# EAGLE board hydra (EAGLE 5.06)
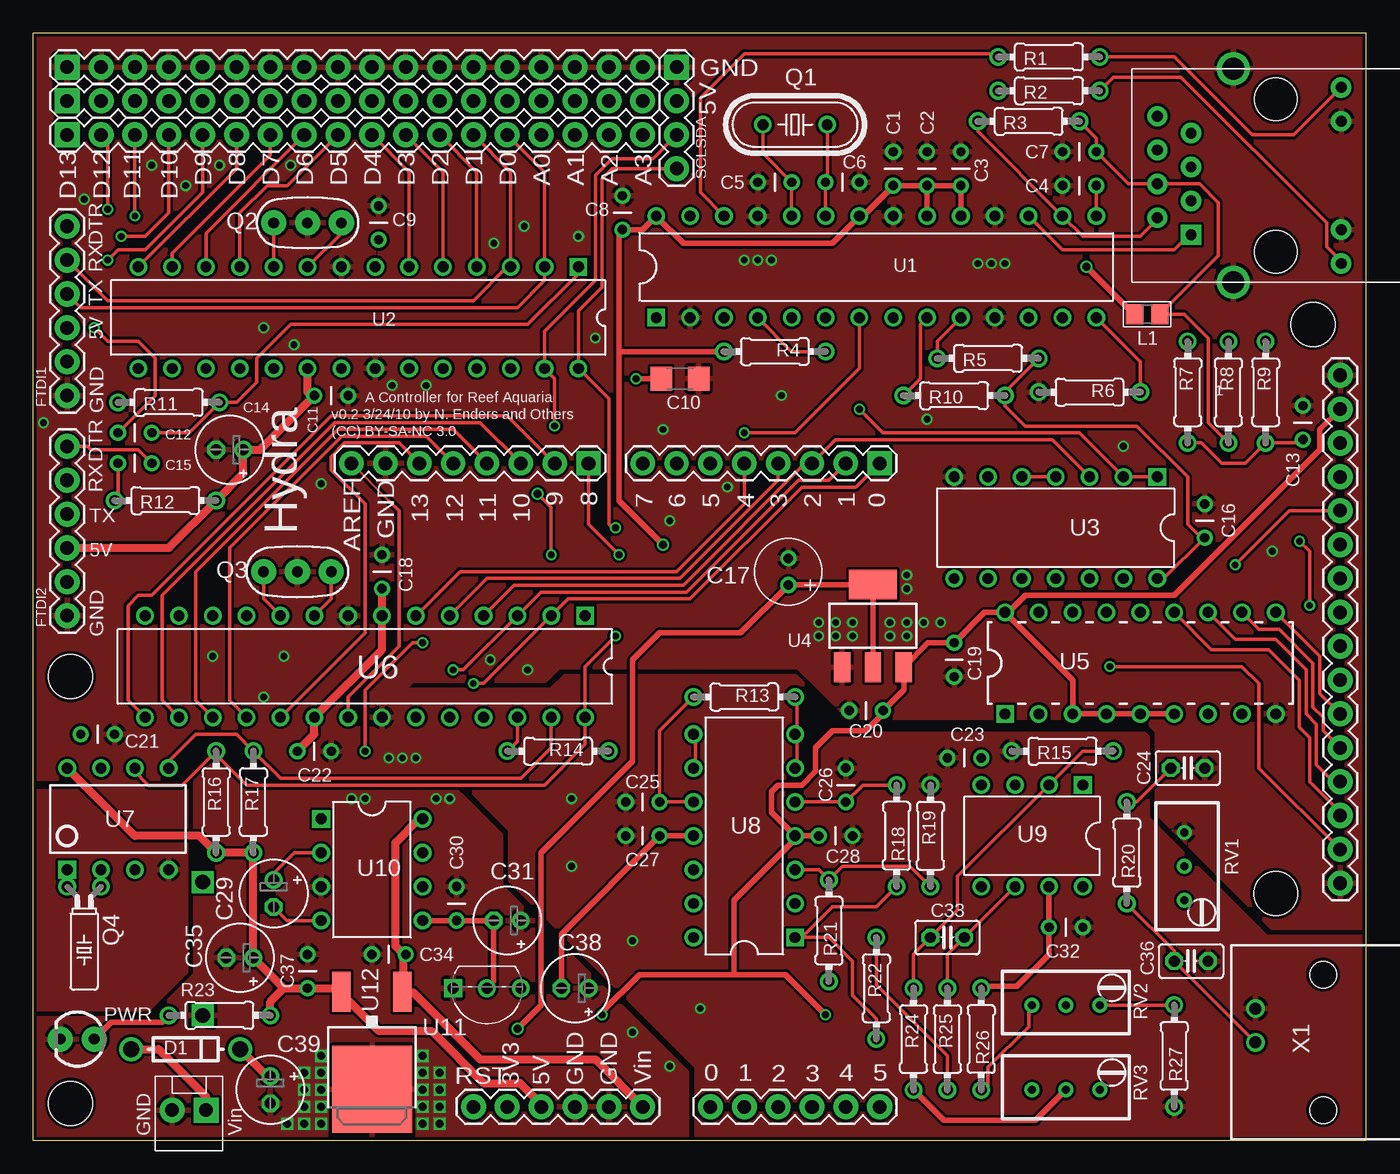
[diagram p0: board, top side]
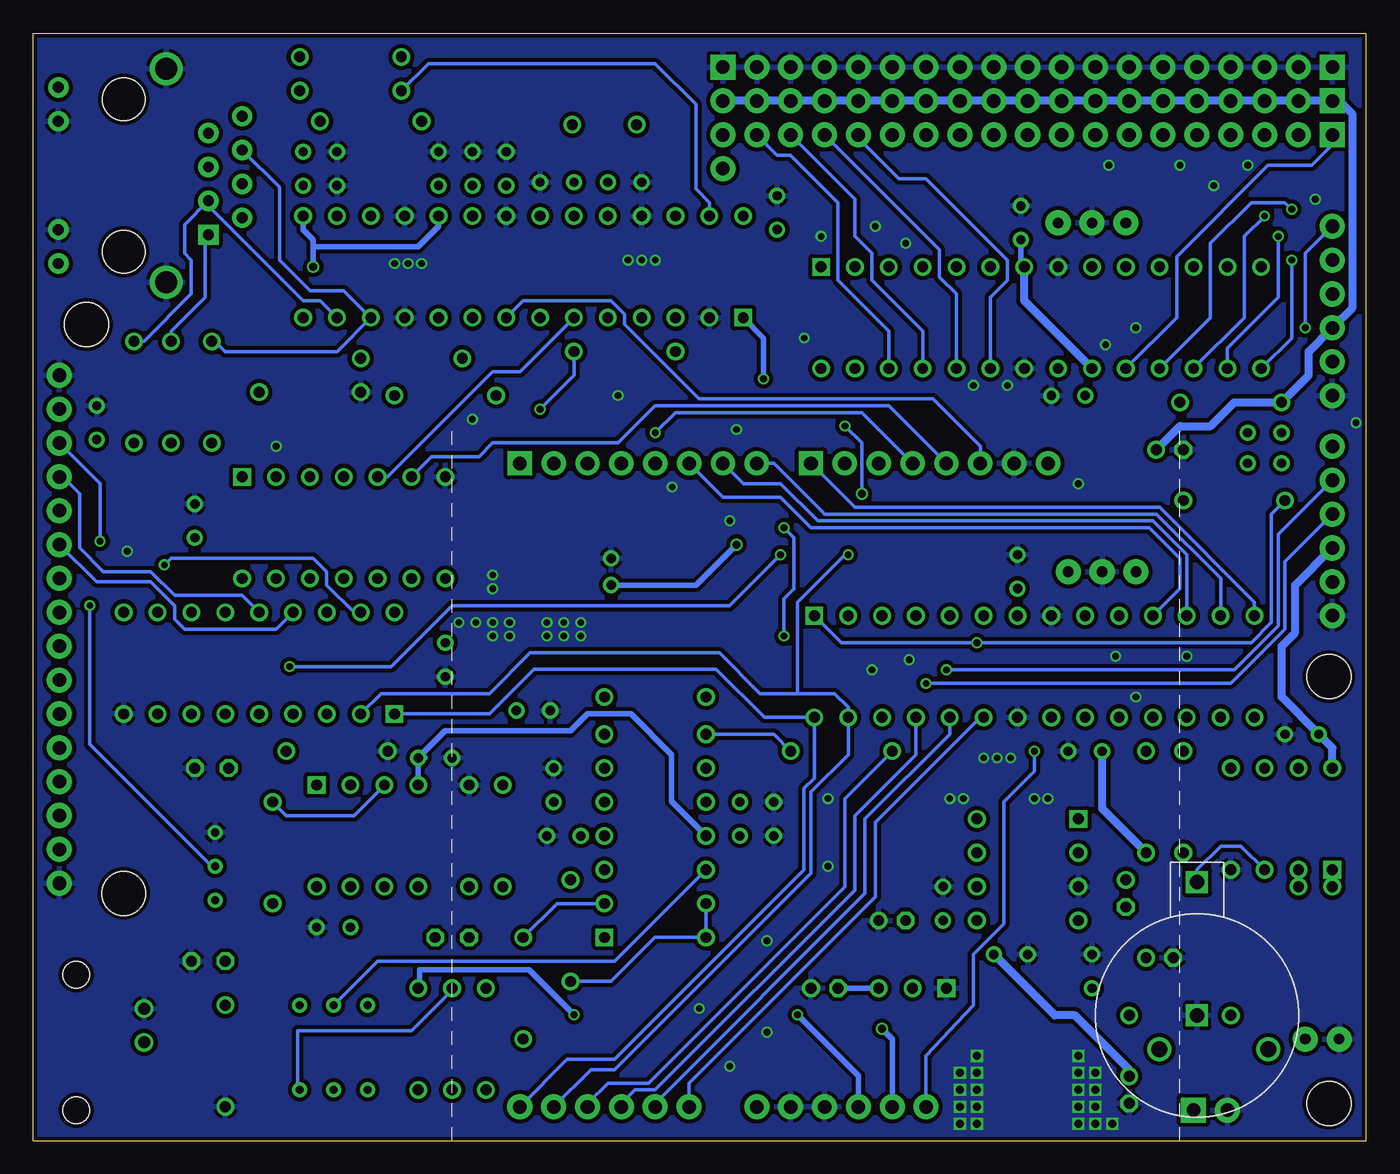
[diagram p1: board, bottom side, seen from below]

Size 100 x 83.05 mm. Coordinates in mm from the lower left corner, seen from the top.
Outline: 100,0 0,0 0,83.05 100,83.05 100,0
Copper layers (1*16): Top 0.035mm / dielectric 1.5mm / Bottom 0.035mm
Design rules "Fusion_eagle_rule_v1.1": minimum track width 6mil, minimum drill 12mil, track to track 6mil, track to pad 6mil, pad to pad 6mil, via to via 6mil, smd to smd 0mil, copper to edge 10mil, drill to drill 10mil, minimum pad ring 10mil, minimum via ring 6mil, stop-mask expansion 2mil, vias tented up to drill 100mil, thermal gap 10mil
Net classes: 0 default: width 0.203 mm, drill 0.508 mm, clearance 0.203 mm; 1 power: width 0.254 mm, drill 0.508 mm, clearance 0.203 mm

## Footprints (pad centres in the part's own frame; a part is rotated, then mirrored left to right if it is on the bottom)
BATT_12MM_KEYSTONE = drill 1.1 square: GND 0,0; V+ 10,0
CAP-PTH-SMALL = drill 0.7 round: 1 0,0; 2 2.54,0
C1206 = smd 1.6 x 1.8: 1 -1.4,0; 2 1.4,0
E2-5 = drill 0.813 pad 1.27 round: + -1.016,0 | drill 0.813 pad 1.27 octagon: - 1.016,0
CAP5MM2MM = drill 0.7 round: + 1,0; - -1,0
C025-025X050 = drill 0.813 octagon: 1 -1.27,0; 2 1.27,0
DIODE-1N4001 = drill 1.2 round: A -4.33,0; C 3.83,0
1X08 = drill 1.016 pad 1.829 square: 1 0,0 | drill 1.016 pad 1.829 round: 2 2.54,0; 3 5.08,0; 4 7.62,0; 5 10.16,0; 6 12.7,0; 7 15.24,0; 8 17.78,0
1X06 = drill 1.016 pad 1.88 round: 1 0,0; 2 2.54,0; 3 5.08,0; 4 7.62,0; 5 10.16,0; 6 12.7,0
HR911105A = drill 0.813 pad 1.524 square: 1 4.445,-6.35 | drill 0.813 pad 1.524 round: 2 3.175,-8.89; 3 1.905,-6.35; 4 0.635,-8.89; 5 -0.635,-6.35; 6 -1.905,-8.89; 7 -3.175,-6.35; 8 -4.445,-8.89; 9 6.604,4.902; 10 4.064,4.902; 11 -4.064,4.902; 12 -6.604,4.902 | drill 1.651 pad 2.159 round: 13 8.001,-3.175; 14 -8.001,-3.175 | hole 3.2: 5.715,0; -5.715,0
1X04 = drill 1.016 pad 1.88 square: 1 0,0 | drill 1.016 pad 1.88 round: 2 2.54,0; 3 5.08,0; 4 7.62,0
STAND-OFF = hole 3.302: 0,0
1X16 = drill 1.016 pad 1.88 round: 1 0,0; 2 2.54,0; 3 5.08,0; 4 7.62,0; 5 10.16,0; 6 12.7,0; 7 15.24,0; 8 17.78,0; 9 20.32,0; 10 22.86,0; 11 25.4,0; 12 27.94,0; 13 30.48,0; 14 33.02,0; 15 35.56,0; 16 38.1,0
MOLEX-1X2 = drill 1.016 pad 1.88 square: 1 0,0 | drill 1.016 pad 1.88 round: 2 2.54,0
0805 = smd 1.3 x 1.5: 1 -0.95,0; 2 0.95,0
LED3MM = drill 0.813 pad 1.88 round: A -1.27,0; K 1.27,0
HC49/S = drill 0.813 round: 1 -2.413,0; 2 2.413,0
RESONATOR-PTH = drill 0.8 pad 1.88 round: 1 -2.54,0; 2 0,0; 3 2.54,0
TC26H = drill 0.813 round: 1 -1.27,0; 2 1.27,0
0204/7 = drill 0.813 round: 1 -3.81,0; 2 3.81,0
RTRIMT93YA = drill 0.61 round: 1 0,-2.54; 2 0,0; 3 0,2.54
DIL28-3 = drill 0.813 square: 1 -16.51,-3.81 | drill 0.813 round: 2 -13.97,-3.81; 3 -11.43,-3.81; 4 -8.89,-3.81; 5 -6.35,-3.81; 6 -3.81,-3.81; 7 -1.27,-3.81; 8 1.27,-3.81; 9 3.81,-3.81; 10 6.35,-3.81; 11 8.89,-3.81; 12 11.43,-3.81; 13 13.97,-3.81; 14 16.51,-3.81; 15 16.51,3.81; 16 13.97,3.81; 17 11.43,3.81; 18 8.89,3.81; 19 6.35,3.81; 20 3.81,3.81; 21 1.27,3.81; 22 -1.27,3.81; 23 -3.81,3.81; 24 -6.35,3.81; 25 -8.89,3.81; 26 -11.43,3.81; 27 -13.97,3.81; 28 -16.51,3.81
DIL14 = drill 0.813 square: 1 -7.62,-3.81 | drill 0.813 round: 2 -5.08,-3.81; 3 -2.54,-3.81; 4 0,-3.81; 5 2.54,-3.81; 6 5.08,-3.81; 7 7.62,-3.81; 8 7.62,3.81; 9 5.08,3.81; 10 2.54,3.81; 11 0,3.81; 12 -2.54,3.81; 13 -5.08,3.81; 14 -7.62,3.81
SOT223 = smd 1.219 x 2.235: 1 -2.311,-3.099; 2 0,-3.099; 3 2.311,-3.099 | smd 3.6 x 2.2: 4 0,3.099
DIL18 = drill 0.813 square: 1 -10.16,-3.81 | drill 0.813 round: 2 -7.62,-3.81; 3 -5.08,-3.81; 4 -2.54,-3.81; 5 0,-3.81; 6 2.54,-3.81; 7 5.08,-3.81; 8 7.62,-3.81; 9 10.16,-3.81; 10 10.16,3.81; 11 7.62,3.81; 12 5.08,3.81; 13 2.54,3.81; 14 0,3.81; 15 -2.54,3.81; 16 -5.08,3.81; 17 -7.62,3.81; 18 -10.16,3.81
DIP08 = drill 0.813 square: 1 -3.81,-3.81 | drill 0.813 round: 2 -1.27,-3.81; 3 1.27,-3.81; 4 3.81,-3.81; 5 3.81,3.81; 6 1.27,3.81; 7 -1.27,3.81; 8 -3.81,3.81
DIL08 = drill 0.813 square: 1 -3.81,-3.81 | drill 0.813 round: 2 -1.27,-3.81; 3 1.27,-3.81; 4 3.81,-3.81; 5 3.81,3.81; 6 1.27,3.81; 7 -1.27,3.81; 8 -3.81,3.81
TO92- = drill 0.813 square: 1 2.54,0 | drill 0.813 round: 2 0,0; 3 -2.54,0
TO252 = smd 1.4 x 3: 1 -2.28,-4.8; 2 2.28,-4.8 | smd 6 x 6.5: 3 0,2.5
1X18 = drill 1.016 pad 1.88 square: 1 0,0 | drill 1.016 pad 1.88 round: 2 2.54,0; 3 5.08,0; 4 7.62,0; 5 10.16,0; 6 12.7,0; 7 15.24,0; 8 17.78,0; 9 20.32,0; 10 22.86,0; 11 25.4,0; 12 27.94,0; 13 30.48,0; 14 33.02,0; 15 35.56,0; 16 38.1,0; 17 40.64,0; 18 43.18,0
AMP_227161 = drill 0.9 pad 1.27 round: 1 0,-5.08; 2 -2.54,-5.08 | hole 2: -5.08,0; 5.08,0

## Placement (x,y rotation side)
BAT100  [BATT_12MM_KEYSTONE]  12.7,9.4 90 bottom
C1  100n  [CAP-PTH-SMALL]  64.52,74.17 270 top
C2  100n  [CAP-PTH-SMALL]  67.06,74.17 270 top
C3  100n  [CAP-PTH-SMALL]  69.6,74.17 270 top
C4  100n  [CAP-PTH-SMALL]  79.76,74.17 180 top
C5  18pf  [CAP-PTH-SMALL]  54.36,71.88 0 top
C6  18pf  [CAP-PTH-SMALL]  61.98,71.88 180 top
C7  100n  [CAP-PTH-SMALL]  77.22,71.63 0 top
C8  100n  [CAP-PTH-SMALL]  44.2,70.87 270 top
C9  0.1uF  [CAP-PTH-SMALL]  25.91,67.56 90 top
C10  10u  [C1206]  48.51,57.15 180 top
C11  0.1uF  [CAP-PTH-SMALL]  21.08,55.88 0 top
C12  0.1uF  [CAP-PTH-SMALL]  8.89,53.09 180 top
C13  100n  [CAP-PTH-SMALL]  95.25,52.58 90 top
C14  10uF  [E2-5]  14.73,51.82 180 top
C15  0.1uF  [CAP-PTH-SMALL]  6.35,50.8 0 top
C16  100n  [CAP-PTH-SMALL]  87.88,47.75 270 top
C17  10uF  [CAP5MM2MM]  56.64,42.67 270 top
C18  0.1uF  [CAP-PTH-SMALL]  26.16,41.4 90 top
C19  0.1uF  [CAP-PTH-SMALL]  69.09,37.34 270 top
C20  0.1uF  [CAP-PTH-SMALL]  63.75,32.26 180 top
C21  0.1uF  [CAP-PTH-SMALL]  3.56,30.48 0 top
C22  0.1uF  [CAP-PTH-SMALL]  19.81,29.21 0 top
C23  0.1uF  [CAP-PTH-SMALL]  71.12,28.7 180 top
C24  3.3p  [C025-025X050]  86.61,27.94 0 top
C25  0.22uF  [CAP-PTH-SMALL]  46.99,25.4 180 top
C26  0.22uF  [CAP-PTH-SMALL]  60.96,25.4 90 top
C27  0.1uF  [CAP-PTH-SMALL]  46.99,22.86 180 top
C28  0.1uF  [CAP-PTH-SMALL]  58.93,22.86 0 top
C29  10uF  [E2-5]  18.03,18.54 270 top
C30  0.1uF  [CAP-PTH-SMALL]  31.75,16.51 90 top
C31  10uF  [E2-5]  35.56,16.51 180 top
C32  0.1uF  [CAP-PTH-SMALL]  76.2,16 0 top
C33  5.6p  [C025-025X050]  68.58,15.24 0 top
C34  0.1uF  [CAP-PTH-SMALL]  25.4,13.97 0 top
C35  47uF  [E2-5]  15.49,13.72 180 top
C36  150p  [C025-025X050]  86.87,13.46 0 top
C37  0.1uF  [CAP-PTH-SMALL]  20.57,11.43 90 top
C38  10uF  [E2-5]  40.64,11.43 180 top
C39  47uF  [E2-5]  17.78,3.81 270 top
D1  [DIODE-1N4001]  11.68,6.86 0 top
D10000-1  [1X08]  63.5,50.8 180 top
FTDI1  [1X06]  2.54,55.88 90 top
FTDI2  [1X06]  2.54,39.37 90 top
J1  HR911105A  [HR911105A]  93.22,72.39 270 top
JP1  [1X04]  48.26,80.52 270 top
JP2  STAND-OFF  [STAND-OFF]  96.01,61.21 0 top
JP3  M16PTH  [1X16]  98.04,57.4 270 top
JP4  [1X08]  41.66,50.8 180 top
JP5  STAND-OFF  [STAND-OFF]  2.79,34.8 0 top
JP6  STAND-OFF  [STAND-OFF]  93.22,18.54 0 top
JP7  STAND-OFF  [STAND-OFF]  2.79,2.79 0 top
JP8  [1X06]  45.72,2.54 180 top
JP9  [1X06]  50.8,2.54 0 top
JP10  [MOLEX-1X2]  12.95,2.29 180 top
L1  Ferrite Bead  [0805]  83.57,61.98 0 top
LED1  [LED3MM]  3.3,7.62 180 top
Q1  [HC49/S]  57.15,76.2 180 top
Q2  16Mhz  [RESONATOR-PTH]  20.57,68.83 0 top
Q3  16Mhz  [RESONATOR-PTH]  19.81,42.67 0 top
Q4  32.768kHZ  [TC26H]  3.81,19.05 180 top
R1  270  [0204/7]  76.2,81.28 0 top
R2  270  [0204/7]  76.2,78.74 0 top
R3  49.9  [0204/7]  74.68,76.45 0 top
R4  10k  [0204/7]  55.63,59.18 180 top
R5  10k  [0204/7]  71.63,58.67 0 top
R6  2k32  [0204/7]  79.25,56.13 180 top
R7  49.9  [0204/7]  86.61,56.13 270 top
R8  49.9  [0204/7]  89.66,56.13 270 top
R9  49.9  [0204/7]  92.46,56.13 270 top
R10  10k  [0204/7]  69.09,55.88 0 top
R11  10k  [0204/7]  10.16,55.37 0 top
R12  10k  [0204/7]  9.91,48.01 0 top
R13  100k  [0204/7]  53.34,33.27 180 top
R14  2.7k  [0204/7]  39.37,29.21 180 top
R15  10k  [0204/7]  77.22,29.21 0 top
R16  2.7k  [0204/7]  13.72,25.4 270 top
R17  2.7k  [0204/7]  16.51,25.4 270 top
R18  100k  [0204/7]  64.77,22.86 90 top
R19  22k  [0204/7]  67.31,22.86 270 top
R20  150k  [0204/7]  82.04,21.59 90 top
R21  22k  [0204/7]  59.69,15.75 90 top
R22  22k  [0204/7]  63.25,11.43 270 top
R23  1k  [0204/7]  13.97,9.4 0 top
R24  4.7K  [0204/7]  66.04,7.62 270 top
R25  22k  [0204/7]  68.58,7.62 270 top
R26  15k  [0204/7]  71.12,7.62 90 top
R27  8.2k  [0204/7]  85.6,6.35 90 top
RV1  5k  [RTRIMT93YA]  86.36,20.57 180 top
RV2  5k  [RTRIMT93YA]  77.47,10.16 270 top
RV3  100k  [RTRIMT93YA]  77.47,3.81 270 top
U1  ENC28J60SP  [DIL28-3]  63.25,65.53 0 top
U2  ATMEGA8  [DIL28-3]  24.38,61.72 180 top
U3  SN74HCT08NDIL14  [DIL14]  76.71,45.97 180 top
U4  LD1117  [SOT223]  62.99,38.61 0 top
U5  MCP23008DIP18  [DIL18]  83.06,35.81 0 top
U6  ATMEGA8  [DIL28-3]  24.89,35.56 180 top
U7  DS1307DS1307  [DIP08]  6.35,24.13 0 top
U8  TL084P  [DIL14]  53.34,22.86 90 top
U9  LF356N  [DIL08]  74.93,22.86 180 top
U10  ICL7660  [DIL08]  25.4,20.32 270 top
U11  79XX  [TO92-]  34.04,11.43 180 top
U12  [TO252]  25.4,6.35 180 top
U$1  M18  [1X18]  2.54,80.52 0 top
U$2  M18  [1X18]  2.54,77.98 0 top
U$3  M18  [1X18]  2.54,75.44 0 top
X1  227161-8  [AMP_227161]  96.77,7.37 270 top

## Library data of the parts
BAT100 C1-C13 C15-C23 C25-C28 C30 C32 C34 C37 D1 D10000-1 FTDI1 FTDI2 J1 JP1 JP2 JP4-JP10 Q1-Q4 R1-R27 U1 U3-U5 U7-U12 U$1-U$3 = _allyourbase
C14 C24 C29 C31 C33 C35 C36 C38 C39 = rcl
JP3 LED1 = SparkFun
L1 = CPT_SMD
RV1-RV3 = resistor
U2 U6 = atmel
X1 = con-coax

## Nets
5V: C16.2 R5.2 R10.2 U3.14
+3V3: C1.2 C2.2 C3.2 C7.2 C8.2 C17.+ JP8.5 L1.1 R4.2 U1.15 U1.19 U1.20 U1.22 U1.28 U4.2 U4.4
+5V [power]: C9.1 C11.1 C14.+ C18.1 C19.1 C20.1 C21.1 C22.1 C28.1 C32.1 C35.+ C37.1 FTDI1.3 FTDI2.3 JP1.2 JP3.2 JP8.4 R11.1 R12.2 R16.2 R17.2 R23.2 R26.2 U2.7 U2.20 U4.3 U5.3 U5.4 U5.5 U5.6 U5.18 U6.7 U6.20 U7.8 U8.4 U9.7 U12.2 U$2.1 U$2.2 U$2.3 U$2.4 U$2.5 U$2.6 U$2.7 U$2.8 U$2.9 U$2.10 U$2.11 U$2.12 U$2.13 U$2.14 U$2.15 U$2.16 U$2.17 U$2.18
+BKL: JP3.15 JP4.1 U6.14
-5V [power]: C23.1 C27.1 C38.- U8.11 U9.4 U11.3
B2: R10.1 U1.9
BUZZ: D10000-1.8 U6.13
D4: JP3.11 U5.10
D5: JP3.12 U5.11
D6: JP3.13 U5.12
D7: JP3.14 U5.13
E: JP3.5 U5.17
GND [power]: BAT100.GND C1.1 C2.1 C3.1 C4.2 C5.1 C6.1 C7.1 C8.1 C9.2 C10.1 C11.2 C13.2 C14.- C16.1 C17.- C18.2 C19.2 C20.2 C21.2 C22.2 C23.2 C24.2 C25.2 C26.2 C27.2 C28.2 C30.2 C31.+ C32.2 C34.1 C35.- C36.2 C37.2 C38.+ C39.- FTDI1.1 FTDI2.1 J1.10 J1.11 J1.13 J1.14 JP1.1 JP3.1 JP3.16 JP4.7 JP8.2 JP8.3 JP10.2 LED1.K Q2.2 Q3.2 R6.2 R15.1 R19.1 R27.1 RV1.1 U1.2 U1.11 U1.18 U1.21 U1.25 U2.8 U2.22 U3.7 U4.1 U5.9 U6.8 U6.22 U7.4 U10.3 U11.1 U12.3 U$1.1 U$1.2 U$1.3 U$1.4 U$1.5 U$1.6 U$1.7 U$1.8 U$1.9 U$1.10 U$1.11 U$1.12 U$1.13 U$1.14 U$1.15 U$1.16 U$1.17 U$1.18 X1.2
IR: D10000-1.5 U6.6
LED_LINK: J1.9 R2.2
LED_STATUS: J1.12 R1.2
MISO: JP4.5 U3.6 U6.18
MOSI: JP4.4 U1.7 U6.17
N$1: Q4.1 U7.2
N$2: Q4.2 U7.1
N$3: BAT100.V+ U7.3
N$4: C29.+ U10.2
N$5: C29.- U10.4
N$6: C33.2 R25.1 RV3.3 U9.6
N$7: R22.1 R25.2 U8.2
N$8: C24.1 R20.2 U9.3
N$9: C15.1 JP8.6 R12.1 U6.1
N$10: JP3.3 RV1.2
N$11: R24.2 RV3.2
N$12: R19.2 R21.2 U8.3
N$13: C36.1 R20.1 X1.1
N$14: C33.1 R15.2 R24.1 U9.2
N$15: R18.1 R22.2 U8.1
N$16: C26.1 R18.2 U8.5
N$17: R13.1 U8.6 U8.7
N$18: C25.1 R13.2 U8.10
N$19: RV2.2 U8.12
N$20: R21.1 U8.13 U8.14
N$21: R14.1 U8.8 U8.9
N$22: R26.1 RV2.1
N$23: R27.2 RV2.3
N$24: LED1.A R23.1
N$25: D10000-1.4 U6.5
N$26: U2.26 U$3.18
N$27: U2.25 U$3.17
N$28: D10000-1.6 U6.11
N$29: D10000-1.7 U6.12
N$30: C10.2 U1.1
N$31: JP9.1 U6.23
N$32: JP9.2 U6.24
N$33: R6.1 U1.14
N$34: JP9.3 U6.25
N$35: C4.1 J1.4 L1.2 R3.2 R8.2
N$36: Q3.3 U6.9
N$37: C13.1 R7.2 R9.2
N$38: Q3.1 U6.10
N$39: R2.1 U1.27
N$40: JP4.2 U6.15
N$41: JP4.3 U6.16
N$42: R1.1 U1.26
N$43: D1.A JP10.1
N$45: JP4.8 U6.21
N$47: U2.24 U$3.16
N$49: D10000-1.1 FTDI2.4 U6.2
N$50: D10000-1.2 FTDI2.5 U6.3
N$51: C15.2 FTDI2.6
N$52: U2.23 U$3.15
N$53: FTDI1.4 U2.2 U$3.14
N$54: FTDI1.5 U2.3 U$3.13
N$55: U2.4 U$3.12
N$56: U2.5 U$3.11
N$57: U2.6 U$3.10
N$58: U2.11 U$3.9
N$59: U2.12 U$3.8
N$60: U2.13 U$3.7
N$61: U2.14 U$3.6
N$62: U2.15 U$3.5
N$63: U2.16 U$3.4
N$64: U2.17 U$3.3
N$65: U2.19 U$3.1
N$66: U2.18 U$3.2
N$67: Q2.1 U2.10
N$68: Q2.3 U2.9
N$69: C12.2 FTDI1.6
N$70: C12.1 R11.2 U2.1
NC3: U1.3
NC5: U1.5
OSC1: C6.2 Q1.1 U1.23
OSC2: C5.2 Q1.2 U1.24
PD2: D10000-1.3 U3.3 U6.4
RS: JP3.4 U5.14
RST: R5.1 U1.10
RW: JP3.6 U5.15
SCK: JP4.6 U1.8 U6.19
SCL: JP1.4 JP9.6 R16.1 U2.28 U5.1 U6.28 U7.6
SDA: JP1.3 JP9.5 R17.1 U2.27 U5.2 U6.27 U7.5
TP1: R4.1 U1.4 U3.1 U3.2
TP2: U1.6 U3.4 U3.5
TPIN+: J1.3 R9.1 U1.13
TPIN-: J1.6 R7.1 U1.12
TPOUT+: J1.1 R8.1 U1.17
TPOUT-: J1.2 R3.1 U1.16
U5VIN [power]: C30.1 C31.- U10.5 U11.2
VIN [power]: C34.2 C39.+ D1.C JP8.1 U10.8 U12.1
VPH: JP9.4 R14.2 U6.26

## Tracks (layer width: path | path; a pad name or v marks a point on that pad's centre or on a via)
5V
  Top 0.254: U3.14 84.84,42.16 C16.2 87.63,45.21 86.61,46.23 86.61,49.78 82.8,53.59 74.42,53.59 72.9,55.12 R10.2 72.9,56.13 R5.2
+3V3  (via drill 0.6)
  Top 0.254: U1.15 C7.2
  Top 0.406: U1.20 C2.2 67.56,71.63 | 67.56,71.63 C3.2 U1.19 | U4.2 U4.4 56.68,41.71 C17.+ 53.07,38.1 46.99,38.1 44.96,36.07 44.96,28.45 38.1,21.59 38.1,10.16 v36.32,8.38 | v47.24,44.7 43.94,48.01 43.94,59.18 | 43.94,59.18 R4.2 | L1.1 82.55,61.98 v78.99,65.53 | 43.94,59.18 43.94,68.07 C8.2 45.72,68.33 U1.28 48.77,67.31 59.94,67.31 U1.22 62.23,69.34 C1.2 67.56,71.63
  Bottom 0.406: C17.+ 50.28,41.67 v47.24,44.7 | JP8.5 35.56,7.62 v36.32,8.38 | U1.19 69.6,68.58 71.12,67.06 78.99,67.06 | U1.15 79.76,68.33 78.99,67.56 78.99,67.06 | 78.99,67.06 v78.99,65.53
+5V  (via drill 0.51)
  Top 0.406: R26.2 71.32,11.58 73.81,11.58 76.22,13.99 76.2,14.02 C32.1 U9.7 | 23.16,10.97 U12.2 22.84,11.43 | U7.8 2.44,27.74 | U8.4 57.15,22.61 52.58,18.03 52.58,12.45 | U8.4 C28.1 | U8.4 55.37,24.64 55.37,26.16 55.88,26.67 57.66,26.67 58.67,27.69 58.67,29.46 59.94,30.73 62.48,30.73 63.75,32 C20.1 65.3,33.81 U4.3 67.13,37.34 C19.1 71.37,39.62 U5.18 | 38.1,2.74 JP8.4 | U5.18 77.98,34.54 U5.3 U5.4 U5.5 U5.6 | U5.18 73.15,39.62 74.42,40.89 85.6,40.89 96.52,51.82 96.52,53.34 JP3.2 | v42.67,9.45 42.67,9.65 45.47,12.45 52.58,12.45 | 52.58,12.45 56.44,12.45 v59.44,9.45 | 20.57,56.13 20.83,55.88 C11.1
  Top 0.61: U7.8 7.62,22.86 12.45,22.86 R16.2 R17.2 C35.+ 18.8,11.43 | 22.84,11.43 C37.1 18.8,11.43 | 23.16,10.97 25.91,8.23 29.87,8.23 33.78,4.32 36.52,4.32 38.1,2.74 | 20.57,56.13 U2.20 | R23.2 17.78,10.41 18.8,11.43 | C22.1 21.08,30.48 U6.20 26.16,36.83 U6.7 C18.1 | FTDI2.3 10.16,44.45 R12.2 15.75,50.04 C14.+ 17.02,51.82 C11.1
  Bottom 0.406: R26.2 71.02,11.58 71.02,12.8 62.79,12.8 v59.44,9.45 | v42.67,9.45 38.1,4.88 JP8.4 | U2.7 25.91,65.79 C9.1
  Bottom 0.61: C22.1 19.81,24.89 R17.2 | U2.20 25.65,62.99 U2.7 | JP1.2 U$2.18 U$2.17 U$2.16 U$2.15 U$2.14 U$2.13 U$2.12 U$2.11 U$2.10 U$2.9 U$2.8 U$2.7 U$2.6 U$2.5 U$2.4 U$2.3 U$2.2 U$2.1 2.03,77.98 1.02,76.96 1.02,62.48 FTDI1.3 4.32,59.18 4.32,57.4 R11.1 9.91,55.37 11.68,53.59 13.97,53.59 C14.+ | U7.8 2.54,29.46 C21.1 6.35,33.27 6.35,37.08 5.33,38.1 5.33,41.66 FTDI2.3
+BKL  (via drill 0.51)
  Top 0.254: v80.77,35.56 90.68,35.56 91.95,34.29 91.95,27.94 JP3.15 | v43.94,43.94 41.66,46.23 JP4.1
  Bottom 0.254: v80.77,35.56 73.15,35.56 68.58,40.13 47.75,40.13 v43.94,43.94 | JP4.1 38.35,47.5 15.49,47.5 8.38,40.39 U6.14
-5V
  Top 0.406: U8.11 C27.1 39.62,15.49 C38.-
  Bottom 0.406: U8.11 52.12,25.45 52.12,28.96 55.17,32 58.42,32 59.69,30.73 69.09,30.73 C23.1 | C23.1 70.61,28.7 | C23.1 U9.4 | U11.3 C38.-
B2
  Top 0.254: U1.9 66.55,61.21 66.55,57.15 R10.1
BUZZ
  Bottom 0.254: D10000-1.8 44.45,50.8 40.77,47.12 40.64,46.99 15.75,46.99 10.92,42.16 U6.13
D4
  Top 0.254: U5.10 96.52,36.32 96.52,33.53 JP3.11
D5
  Top 0.254: U5.11 91.95,38.35 93.47,38.35 96.01,35.81 96.01,32.51 96.77,31.75 96.77,30.73 JP3.12
D6
  Top 0.254: U5.12 90.17,37.59 93.22,37.59 95.5,35.31 95.5,32 96.27,31.24 96.27,28.19 97.54,26.92 JP3.13
D7
  Top 0.254: U5.13 88.39,36.83 92.71,36.83 95,34.54 95,30.99 95.76,30.23 95.76,26.92 98.04,24.64 JP3.14
E  (via drill 0.51)
  Top 0.254: v90.17,43.18 94.23,47.24 JP3.5
  Bottom 0.254: U5.17 75.95,39.62 77.98,41.66 77.98,42.67 78.99,43.69 89.66,43.69 v90.17,43.18
GND  (via drill 0.51, 0.6)
  Top 0.406: U12.3 25.6,3.96 25.6,6.1 25.4,6.35
  other vias: 21.59,6.35 21.59,5.08 21.59,3.81 21.59,2.54 21.59,1.27 29.21,1.27 29.21,2.54 29.21,3.81 29.21,5.08 29.21,6.35 21.59,49.28 18.8,36.32 17.27,33.27 50.04,9.91 40.39,25.65 37.08,35.31 58.93,38.86 60.2,38.86 61.47,38.86 64.26,38.86 65.53,38.86 66.8,38.86 17.27,60.96 0.76,53.85 34.54,67.31 40.89,67.82 81.79,52.07 92.96,44.2 20.32,1.27 20.32,2.54 20.32,3.81 30.48,1.27 30.48,2.54 19.05,1.27 47.75,46.48 13.46,36.32 56.13,55.88 67.06,54.1 47.24,53.34 42.16,60.2 11.43,71.63 8.89,73.15 13.97,73.15 19.3,73.15 36.83,68.58 52.07,49.02 34.29,36.07 3.81,70.61 26.67,28.7 27.69,28.7 28.7,28.7 23.88,25.65 24.89,25.65 30.23,25.65 31.24,25.65 26.92,56.64 29.46,56.64 30.48,3.81 30.48,5.08 20.32,5.08 58.93,37.85 60.2,37.85 61.47,37.85 64.26,37.85 65.53,37.85 65.53,41.4 65.53,42.42 71.88,65.79 70.87,65.79 72.9,65.79 54.36,66.04 55.37,66.04 53.34,66.04 19.56,59.69 44.96,14.99 40.39,20.57 44.96,8.13 47.75,5.59 68.07,38.86
  pour Bottom (isolate 0.305): 0,83.06 100.08,82.8 99.82,-0.25 0,0
  pour Top: 0.25,26.16 0,9.91 8.64,9.91 11.43,12.7 11.43,26.16
  pour Top: 99.82,15.24 92.46,15.24 83.57,24.13 83.57,30.23 83.31,30.48 61.47,30.48 57.15,34.8 39.88,34.8 38.86,33.78 26.42,33.78 25.15,32.51 25.15,30.48 27.94,27.69 31.5,27.69 35.81,23.37 35.81,19.56 49.78,5.59 49.78,0 99.82,0
  pour Top: 49.02,0.25 49.02,5.08 35.05,19.05 35.05,22.86 28.96,28.96 12.19,28.96 12.19,12.45 8.89,9.14 0.25,9.14 0.25,0 48.77,0
  pour Top: 100.08,16 92.96,16 84.33,24.64 84.33,30.73 83.31,31.75 61.47,31.75 57.66,35.56 39.37,35.56 38.35,34.54 28.45,34.54 26.67,32.77 27.43,27.69 25.15,27.43 11.43,27.18 11.43,23.37 7.87,23.37 4.06,27.18 0.25,27.18 0.25,83.06 0.51,83.31 100.33,83.31 100.58,83.06 100.58,16.51
  pour Top: 70.1,51.05 70.1,32.77 69.09,31.75 61.21,31.75 54.86,38.1 54.86,52.32 68.58,52.32 69.85,51.05
IR
  Top 0.254: 53.34,51.05 D10000-1.5 53.34,47.75 48.26,42.67 32,42.67 U6.6
LED_LINK
  Top 0.254: R2.2 81.03,79.76 86.11,79.76 97.03,68.83 97.03,67.06 98.12,65.96 J1.9
LED_STATUS
  Top 0.254: R1.2 85.6,81.28 91.44,75.44 94.56,75.44 J1.12
MISO
  Top 0.254: JP4.5 29.46,52.83 23.11,52.83 14.73,44.45 14.73,33.02 U6.18
  Bottom 0.254: U3.6 70.1,51.31 66.55,51.31 65.53,52.32 56.13,52.32 53.34,55.12 35.81,55.12 JP4.5
MOSI  (via drill 0.51)
  Top 0.254: JP4.4 31.5,53.34 22.86,53.34 12.19,42.67 12.19,33.02 U6.17 | v53.34,53.09 57.15,53.09 61.98,57.91 U1.7
  Bottom 0.254: v53.34,53.09 51.82,54.61 37.85,54.61 JP4.4
N$1
  Top 0.254: Q4.1 5.18,19.2 5.18,20.12 U7.2
N$2
  Top 0.254: Q4.2 2.74,19.2 2.74,20.12 U7.1
N$3
  Bottom 0.254: U7.3 9.4,22.1 10.92,22.1 12.7,20.32 BAT100.V+
N$4
  Top 0.254: U10.2 19.56,21.59 18.03,20.07 C29.+
N$5
  Top 0.254: U10.4 19.05,16.51 C29.-
N$6
  Top 0.254: U9.6 C33.2 68.58,13.97 R25.1
  Bottom 0.254: RV3.3 80.16,3.96 80.16,8.23 71.63,8.23 68.58,11.28 R25.1
N$7
  Top 0.254: R25.2 68.58,6.35 63.25,11.68 R22.1
  Bottom 0.254: U8.2 60.71,17.78 R22.1
N$8
  Top 0.254: R20.2 82.8,25.4 C24.1
  Bottom 0.254: U9.3 75.95,24.38 81.03,24.38 R20.2
N$9  (via drill 0.51)
  Top 0.254: v24.89,29.21 24.89,33.78 28.45,37.34 v29.21,37.34 | C15.1 6.35,48.26 R12.1
  Bottom 0.254: JP8.6 33.02,6.35 29.46,10.16 29.46,13.97 27.18,16.26 27.18,25.4 24.89,27.69 v24.89,29.21 | U6.1 39.37,37.34 v29.21,37.34 8.64,37.34 7.11,38.86 7.11,46.99 R12.1
N$10  (via drill 0.51)
  Top 0.254: v95,44.96 95.76,44.2 v95.76,40.13
  Bottom 0.254: v95,44.96 95,49.28 JP3.3 | v95.76,40.13 95.76,29.72 86.61,20.57 RV1.2
N$11
  Top 0.406: R24.2 68.33,1.52 75.18,1.52 RV3.2
N$12
  Top 0.254: U8.3 58.93,20.32 R21.2 60.71,20.57 65.79,20.57 R19.2
N$13
  Top 0.254: X1.1 C36.1 85.6,14.22 R20.1
N$14
  Top 0.254: R24.1 66.04,13.97 C33.1 69.34,17.27 69.34,19.81 U9.2 78.74,29.21 R15.2
N$15
  Top 0.254: 57.66,15.24 U8.1 | 57.66,15.24 59.94,17.53 63.25,17.53 R18.1 | R22.2 63.25,9.14 61.47,10.92 61.47,13.46 59.69,15.24 57.66,15.24
N$16
  Top 0.254: U8.5 C26.1 62.23,26.67 R18.2
N$17
  Top 0.254: 57.3,30.48 57.3,28.04 U8.6 | 57.3,30.48 57.3,33.22 R13.1 | 57.3,30.48 U8.7
N$18
  Top 0.254: R13.2 46.99,30.73 C25.1 U8.10
N$19
  Bottom 0.254: U8.12 56.39,13.46 74.17,13.46 RV2.2
N$20
  Bottom 0.254: U8.13 U8.14 53.34,15.24 56.64,11.94 R21.1
N$21
  Top 0.254: U8.9 49.68,28.04 49.68,30.48 U8.8
  Bottom 0.254: U8.8 44.45,30.48 R14.1
N$22
  Top 0.254: RV2.1 74.68,10.06 74.68,8.53 71.63,5.49 71.63,3.96 71.32,3.66 R26.1
N$23
  Top 0.254: RV2.3 R27.2
N$24
  Top 0.406: LED1.A 5.84,8.89 9.65,8.89 R23.1
N$25
  Top 0.254: D10000-1.4 55.88,49.53 48.51,42.16 34.04,42.16 U6.5
N$26
  Bottom 0.254: U2.26 35.81,60.71 39.62,64.52 39.62,70.36 43.18,73.91 44.2,73.91 U$3.18
N$27
  Bottom 0.254: U2.25 33.27,60.71 37.08,64.52 37.08,66.55 38.35,67.82 38.35,70.61 U$3.17
N$28
  Bottom 0.254: D10000-1.6 48.26,48.26 43.94,48.26 41.66,45.97 16.26,45.97 13.97,43.69 13.97,41.4 U6.11
N$29
  Bottom 0.254: D10000-1.7 46.74,49.28 43.94,49.28 41.15,46.48 16,46.48 13.46,43.94 U6.12
N$30  (via drill 0.51)
  Top 0.406: v45.21,57.15 C10.2
  Bottom 0.406: U1.1 45.21,60.2 v45.21,57.15
N$31
  Bottom 0.254: JP9.1 50.8,4.32 36.83,18.29 36.83,23.88 28.96,31.75 U6.23
N$32
  Bottom 0.254: JP9.2 53.09,2.79 53.09,3.05 37.59,18.54 37.59,24.13 31.24,30.48 U6.24
N$33
  Top 0.254: U1.14 83.06,58.42 R6.1
N$34
  Bottom 0.254: JP9.3 55.88,2.79 54.86,3.81 53.34,3.81 38.35,18.8 38.35,24.38 33.78,28.96 U6.25
N$35
  Top 0.254: R8.2 88.14,53.85 88.14,60.2 86.36,61.98 L1.2 88.9,66.36 88.9,70.36 87.5,71.75 J1.4 82.17,71.75 C4.1 79.76,75.18 R3.2
N$36
  Top 0.254: U6.9 22.35,40.64 Q3.3
N$37
  Top 0.254: R7.2 87.63,52.32 89.15,50.8 90.93,50.8 R9.2 95,52.32 C13.1
N$38
  Top 0.254: U6.10 17.27,40.64 Q3.1
N$39
  Bottom 0.254: R2.1 70.36,80.77 53.34,80.77 50.29,77.72 50.29,71.37 49.28,70.36 U1.27
N$40
  Top 0.254: JP4.2 35.56,54.36 22.35,54.36 8.89,40.89 7.87,40.89 7.11,40.13 7.11,33.02 U6.15
N$41
  Top 0.254: JP4.3 33.53,53.85 22.61,53.85 9.65,40.89 9.65,33.02 U6.16
N$42
  Top 0.254: R1.1 72.14,81.53 53.34,81.53 50.04,78.23 50.04,71.12 U1.26
N$43
  Top 0.61: JP10.1 12.95,3.3 9.4,6.86 D1.A
N$45
  Top 0.203: 26.67,48.01 JP4.8
  Top 0.254: 26.67,48.01 27.43,47.24 27.43,37.08 23.62,33.27 U6.21
N$47
  Bottom 0.254: U2.24 30.73,63.5 32,64.77 32,66.8 U$3.16
N$49  (via drill 0.51)
  Top 0.254: D10000-1.1 61.72,49.02 57.66,49.02 49.28,40.64 40.13,40.64 U6.2 33.78,34.29 v33.02,34.29
  Bottom 0.254: FTDI2.4 6.1,43.43 6.1,38.35 10.16,34.29 v33.02,34.29
N$50  (via drill 0.51)
  Top 0.254: D10000-1.2 59.69,49.53 57.4,49.53 49.02,41.15 38.1,41.15 U6.3 32.26,35.31 v31.5,35.31
  Bottom 0.254: FTDI2.5 6.6,45.47 6.6,38.61 9.91,35.31 v31.5,35.31
N$51
  Top 0.254: FTDI2.6 4.06,52.07 4.32,51.82 7.87,51.82 C15.2
N$52
  Bottom 0.254: U2.23 28.19,63.25 26.92,64.52 26.92,66.04 33.02,72.14 35.05,72.14 38.1,75.18 U$3.15
N$53
  Top 0.254: U$3.14 38.35,72.64 U2.2 38.35,64.52 36.32,62.48 3.56,62.48 FTDI1.4
N$54
  Top 0.254: U$3.13 35.81,72.64 U2.3 35.56,65.53 33.02,62.99 5.59,62.99 FTDI1.5
N$55
  Top 0.254: U2.4 33.27,72.64 U$3.12
N$56
  Top 0.254: U2.5 30.73,72.64 U$3.11
N$57
  Top 0.254: U2.6 28.19,72.64 U$3.10
N$58
  Top 0.254: U2.11 15.49,69.6 17.53,71.63 19.05,71.63 U$3.9
N$59
  Top 0.254: U2.12 12.95,68.07 U$3.8
N$60
  Top 0.254: U2.13 10.41,66.55 17.78,73.91 U$3.7
N$61
  Top 0.254: U2.14 15.24,72.9 U$3.6
N$62  (via drill 0.51)
  Top 0.254: v5.59,66.04 6.35,66.8 8.38,66.8 12.7,71.12 U$3.5
  Bottom 0.254: U2.15 5.59,60.2 v5.59,66.04
N$63  (via drill 0.51)
  Top 0.254: v6.6,67.82 8.38,67.82 10.16,69.6 U$3.4
  Bottom 0.254: U2.16 10.41,59.44 6.6,63.25 v6.6,67.82
N$64  (via drill 0.51)
  Top 0.254: v7.62,69.34 U$3.3
  Bottom 0.254: U2.17 9.14,61.72 9.14,67.82 v7.62,69.34
N$65
  Bottom 0.254: U2.19 14.22,61.72 14.22,66.29 7.37,73.15 4.06,73.15 2.54,74.68 U$3.1
N$66  (via drill 0.51)
  Top 0.254: v5.59,69.85 5.59,74.93 U$3.2
  Bottom 0.254: U2.18 11.68,61.72 11.68,67.31 8.64,70.36 6.1,70.36 v5.59,69.85
N$67
  Top 0.254: U2.10 Q2.1
N$68
  Top 0.254: U2.9 23.11,68.07 Q2.3
N$69  (via drill 0.51)
  Top 0.254: v4.57,60.96 5.59,59.94 7.87,59.94 9.14,58.67 9.14,55.88 C12.2
  Bottom 0.254: v4.57,60.96 4.57,66.55 FTDI1.6
N$70
  Top 0.254: U2.1 40.89,65.02 37.08,61.21 19.3,61.21 16.76,58.67 16.76,56.9 15.24,55.37 R11.2 11.68,53.09 C12.1
OSC1
  Top 0.254: U1.23 C6.2 59.56,72.01 Q1.1
OSC2
  Top 0.254: U1.24 C5.2 54.74,74.04 Q1.2
PD2
  Top 0.254: U3.3 76.45,52.58 60.2,52.58 D10000-1.3 57.91,50.8 48.77,41.66 36.07,41.66 U6.4
RS
  Bottom 0.254: U5.14 84.33,40.89 89.41,40.89 91.19,42.67 94.74,42.67 96.52,44.45 96.52,48.51 97.79,49.78 JP3.4
RST
  Top 0.254: U1.10 67.82,59.94 R5.1
RW
  Bottom 0.254: U5.15 81.79,38.35 88.65,38.35 89.41,39.12 89.41,40.13 91.19,41.91 95.25,41.91 JP3.6
SCK
  Top 0.254: JP4.6 27.43,52.32 23.37,52.32 22.35,51.31 22.35,50.29 24.89,47.75 24.89,38.1 U6.19
  Bottom 0.254: JP4.6 28.96,52.07 32.51,55.63 50.04,55.63 55.63,61.21 55.63,61.98 56.64,62.99 63.25,62.99 U1.8
SCL  (via drill 0.51)
  Top 0.254: U7.6 7.62,27.69 8.64,26.67 11.18,26.67 R16.1 13.72,28.96 16,26.67 38.35,26.67 41.4,29.72 U6.28 41.4,35.56 v43.69,37.85 | v43.69,45.97 43.43,45.97 43.18,46.23 43.18,55.63 U2.28 40.89,62.23 42.67,64.01 42.67,72.14 43.43,72.9 JP1.4
  Bottom 0.254: U5.1 65.79,32 62.43,35.36 48.77,35.36 45.16,31.75 U6.28 41.4,27.18 42.16,26.42 42.16,20.32 56.39,6.1 59.94,6.1 JP9.6 | v43.69,37.85 43.69,40.64 42.93,41.4 42.93,45.21 v43.69,45.97
SDA  (via drill 0.51, 0.6)
  Top 0.254: 10.16,28.19 U7.5 10.16,28.45 12.19,30.48 15.24,30.48 R17.1 18.54,27.18 36.58,27.18 38.86,29.46 U6.27 | v39.12,53.59 39.12,57.15 U2.27 38.35,60.71 42.16,64.52 42.16,72.39 43.43,73.66 46.48,73.66 JP1.3 | v37.85,48.51 38.86,47.5 v38.86,43.94
  Bottom 0.254: 42.67,33.53 39.88,33.53 38.86,32.51 U6.27 38.86,28.96 41.66,26.16 41.66,20.07 56.39,5.33 58.17,5.33 JP9.5 | 42.67,33.53 45.47,33.53 48.51,36.58 62.74,36.58 65.79,33.53 73.91,33.53 U5.2 | v39.12,53.59 37.85,52.32 v37.85,48.51 | v38.86,43.94 39.12,43.94 42.67,40.39 42.67,33.53
TP1  (via drill 0.51)
  Top 0.254: U1.4 56.9,59.18 R4.1 | U3.1 U3.2 78.49,53.09 63.75,53.09 v61.98,54.86
  Bottom 0.254: R4.1 59.44,57.4 v61.98,54.86
TP2
  Top 0.254: U3.5 U3.4
  Bottom 0.254: U1.6 63.5,57.66 65.53,57.66 73.41,49.78 U3.5
TPIN+
  Bottom 0.254: U1.13 78.49,62.99 79.76,62.99 86.87,70.1 J1.3 88.65,68.71 88.65,66.55 88.14,66.04 88.14,63.5 91.69,59.94 R9.1
TPIN-
  Bottom 0.254: R7.1 86.36,59.94 85.6,59.18 77.22,59.18 U1.12 76.71,63.75 79.25,63.75 81.53,66.04 81.53,71.5 J1.6
TPOUT+
  Top 0.254: U1.17 77.22,66.8 85.6,66.8 86.74,67.94 J1.1
  Bottom 0.254: R8.1 89.66,60.71 87.12,63.25 87.12,67.69 J1.1
TPOUT-
  Top 0.254: J1.2 84.33,69.09 83.06,67.82 78.74,67.82 U1.16 70.87,75.69 R3.1
U5VIN
  Top 0.406: U10.5 C30.1 C31.- 34.54,11.94 U11.2
VIN
  Top 0.406: 27.74,14.02 C34.2 27.74,13.72 | U12.1 27.74,11.28 27.74,11.12 | 28.96,24.13 U10.8
  Top 0.61: 27.74,13.72 27.74,11.28 | 27.74,14.02 27.18,14.58 27.18,22.35 28.96,24.13 | JP8.1 42.16,6.1 33.53,6.1 28.5,11.12 27.74,11.12 | D1.C 17.55,4.83 C39.+
  Bottom 0.406: C39.+ 17.78,5.08
  Bottom 0.61: 17.78,5.08 17.78,5.33 21.84,9.4 23.37,9.4 C34.2
VPH
  Top 0.254: R14.2 36.32,29.97 U6.26
  Bottom 0.254: JP9.4 58.42,2.79 56.9,4.32 53.85,4.32 39.12,19.05 39.12,25.65 R14.2

## Text on the board
tPlace: A Controller for Reef Aquaria | v0.2 3/24/10 by N. Enders and Others | (CC) BY-SA-NC 3.0 | Hydra
tNames: GND | 5V | SDA | D9 | D8 | D7 | D6 | D5 | D4 | D3 | D2 | D1 | D0 | A0 | A1 | A2 | A3 | SCL | D13 | D12 | D11 | D10 | DTR | RX | TX | 5V | 1 | GND | DTR | RX | 9 | 8 | 7 | 6 | 5 | 4 | 3 | 2 | 1 | 0 | TX | 13 | 12 | 11 | 10 | GND | 5V | AREF | GND | PWR | RST | 3V3 | 5V | GND | GND | Vin | 0 | 1 | 2 | 3 | 4 | 5 | GND | Vin